# Altium PCB MiniMax 4bit.pcbdoc (part 3 of 3)
Units mil, origin at the board's own origin, x right, y up, seen from the top; angles counter-clockwise.
Board outline 6151.56 x 5816.92 mil, 2 copper layers (Top Layer, Bottom Layer); 181 components, 187 nets, 727 pads, 463 vias.
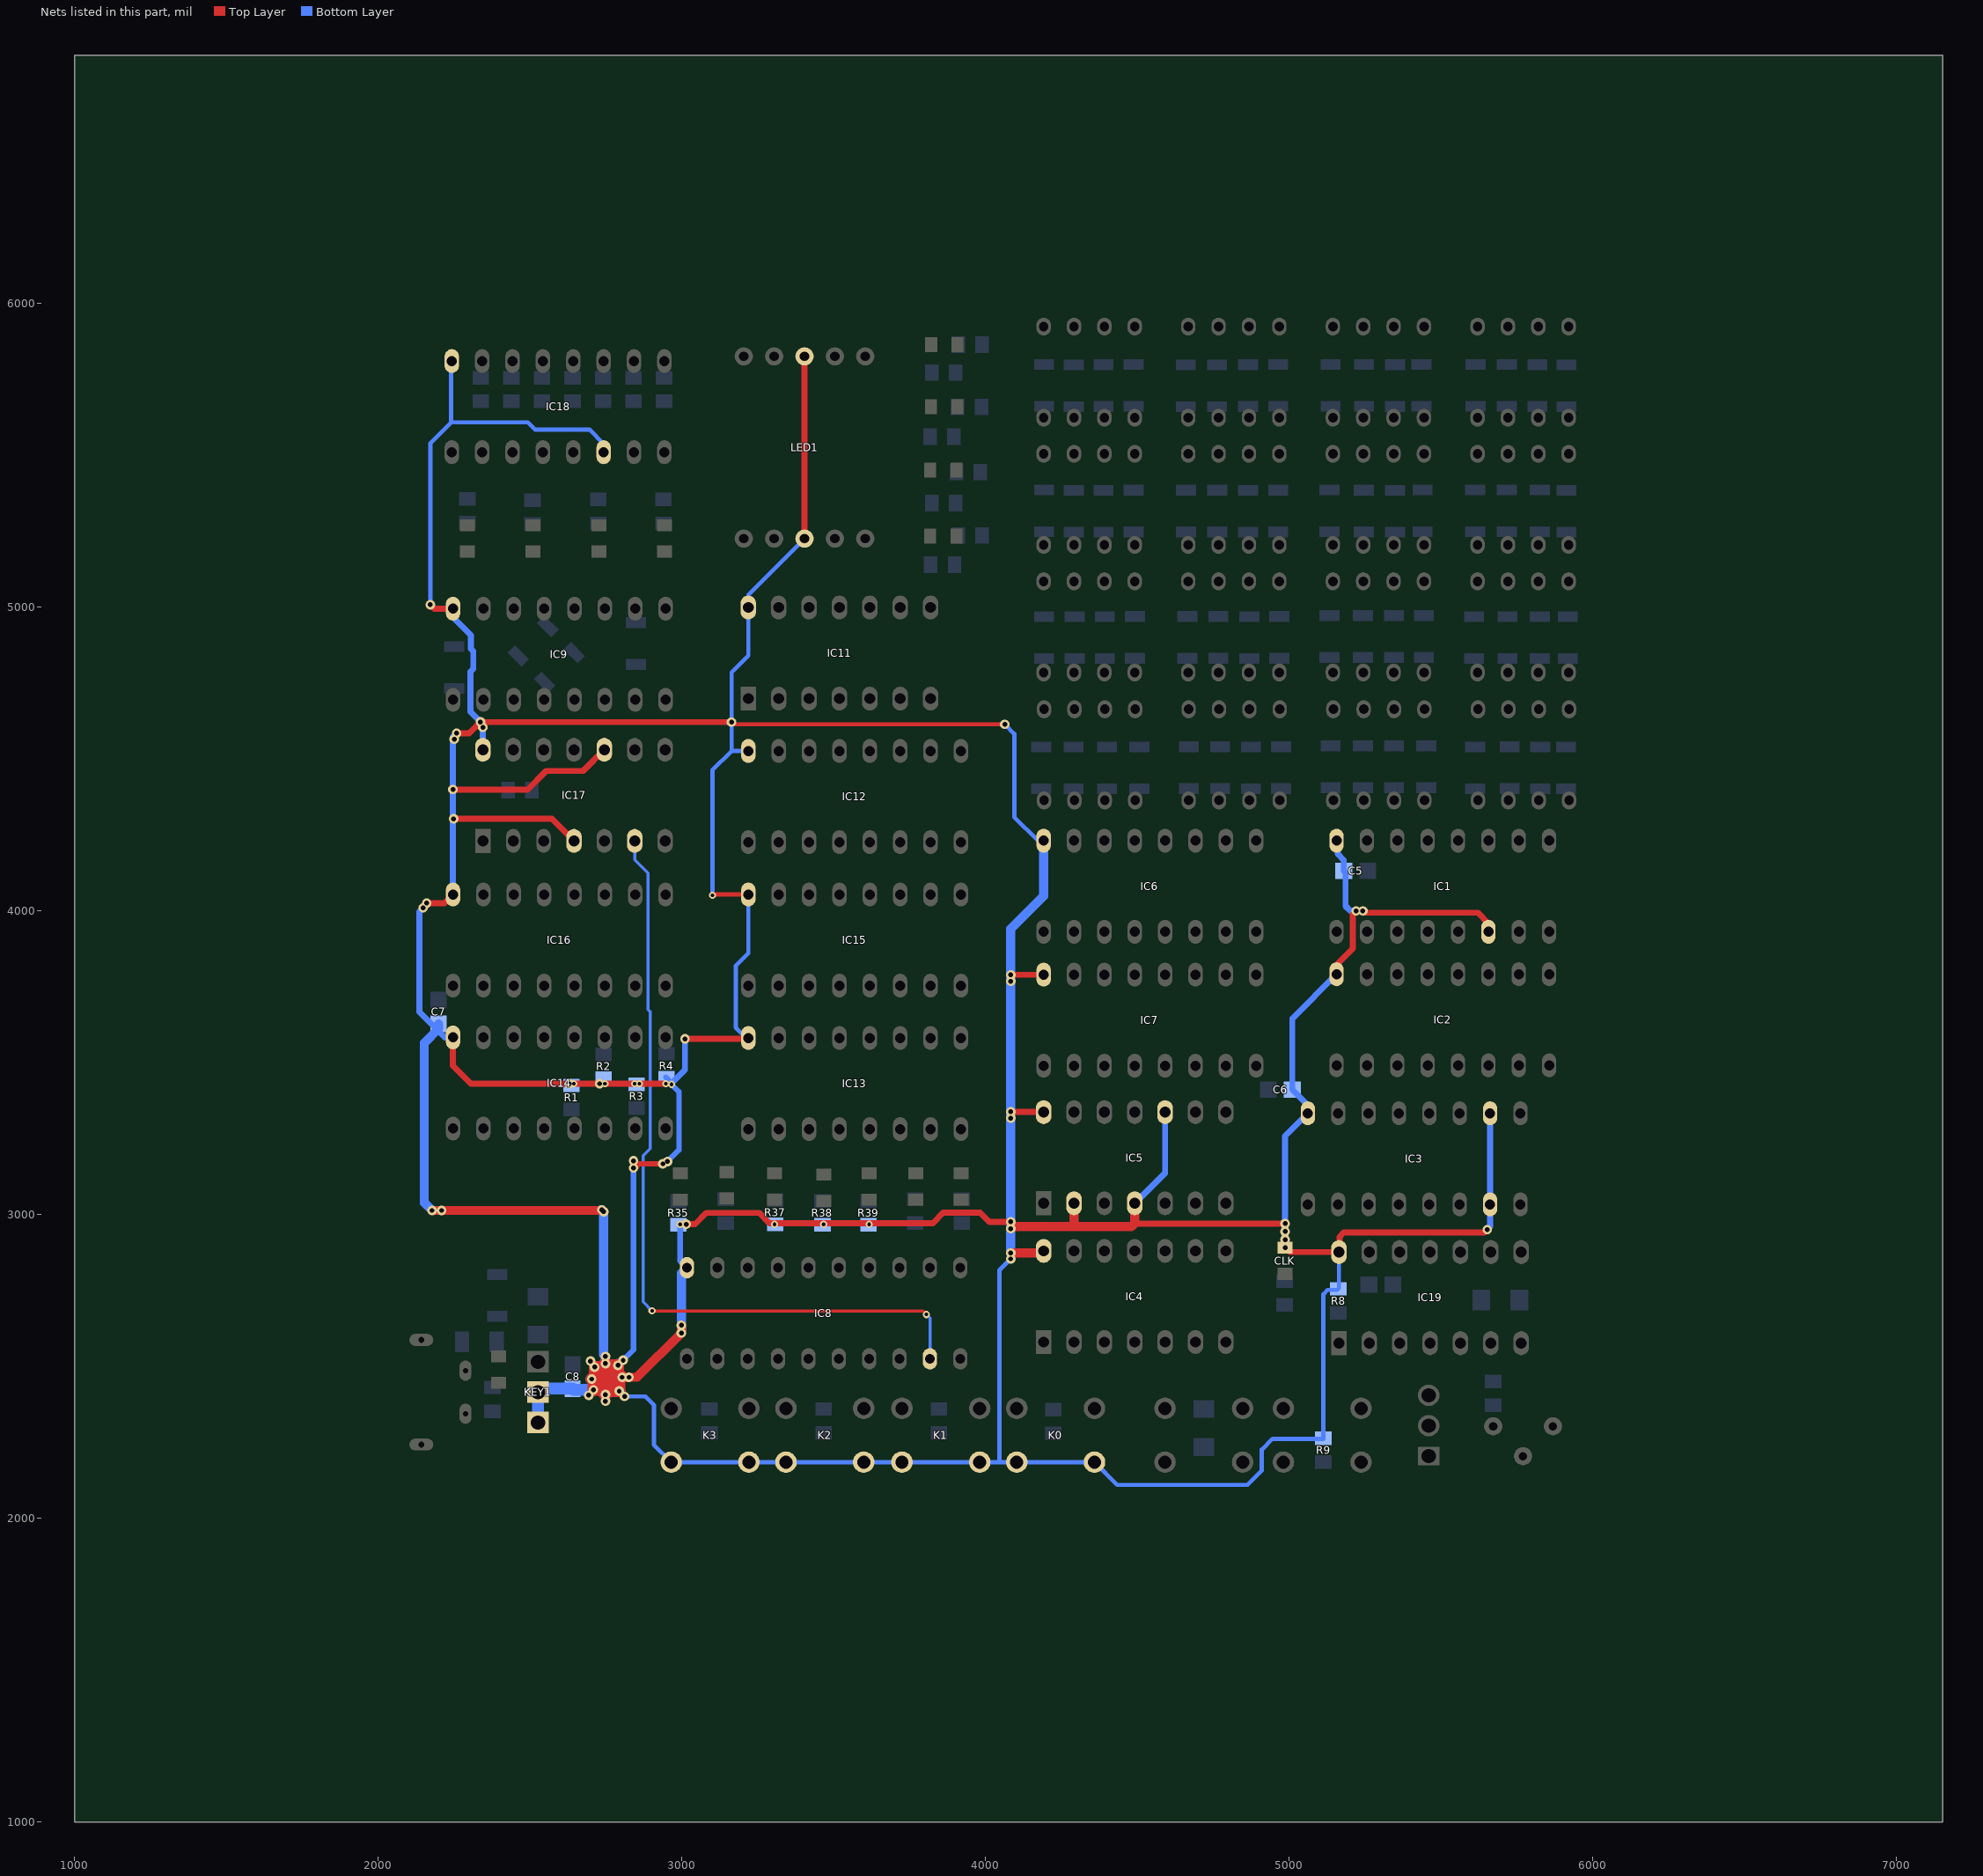
[diagram p3: the nets of this part, all layers, seen from the top]

## Via types
v1: diameter 24, hole 12, Top Layer to Bottom Layer, tented both sides, 306 vias
v2: diameter 27.56, hole 15.75, Top Layer to Bottom Layer, tented both sides, 98 vias
v3: diameter 31.5, hole 15.75, Top Layer to Bottom Layer, tented both sides, 59 vias

## Nets (pads, with @x,y where several pads share a name; then routed paths per layer and width w, separated by ;. In a path a pad name is that pad's centre, name@x,y a point inside that pad or via, vN(x,y) a via of type N, cw(c..) or ccw(c..) an arc to the next point about the centre after c; other vN are vias at no path point) (continued)
VCC: C5.1 C6.1 C7.1 C8.1 CLK.2 IC1.6 IC1.16 IC2.16 IC3.7 IC3.10 IC3.16 IC4.14 IC5.2 IC5.4 IC5.10 IC5.14 IC6.16 IC7.16 IC8.20 IC9.16 IC11.14 IC12.16 IC13.16 IC14.16 IC15.16 IC16.16 IC17.4 IC17.10 IC17.14 IC18.6 IC18.16 IC19.14 K0.1 K0.2 K1.1 K1.2 K2.1 K2.2 K3.1 K3.2 KEY1.2 KEY1.3 LED1.3 LED1.8 R1.2 R2.2 R3.2 R4.2 R8.2 R9.2 R35.1 R37.1 R38.1 R39.1 | length 26939.2
  Top Layer w14.02: v1(3100.39,4051.17) 3103.17,4053.91 IC15.16@3218.5,4053.93 ; v3(3163.37,4621.47) 3170.67,4614.21 v3(4062.97,4614.21)
  Top Layer w17.99: v3(2952.24,3174.68) 2944.88,3167.32 v3(2937.01,3167.32) 2850.39,3167.32 v3@2840.55,3177.16 ; v3(2840.55,3153.54) v3(2840.55,3177.16) ; v3@2840.55,3153.54 2846.45,3153.54 2850.38,3157.21 v3@2840.55,3177.16 ; v3@2840.55,3153.54 v3@2840.55,3177.16
  Top Layer w19.68: v1(2643.7,3431.1) v3(2728.93,3431.1) v1(2746.06,3431.1) v1(2844.49,3431.1) v1(2860.22,3431.11) v1(2946.85,3431.1) ; v1@2994.07,2967.81 2994.76,2968.5 v3(3013.78,2968.5) 3043.26,2968.5 3080.67,3005.91 3253.97,3005.91 3288.07,2971.81 3769.67,2971.81 ; v3@3009.87,3578.71 3215.77,3578.71 IC13.16@3218.5,3581.49 ; LED1.3@3403.54,5225.58 LED1.8@3403.54,5825.58
  Top Layer w20: v3@2159.47,4025.61 2217.77,4025.61 IC16.16@2246.06,4053.93 ; v3(2171.26,5007.86) 2184.27,4994.91 IC9.16@2246.06,4994.88 ; IC14.16@2246.06,3583.46 2246.07,3490.11 2305.07,3431.11 v3(2628.4,3431.1) ; v3(2246.06,4399.6) 2492.17,4399.61 2553.17,4460.61 2674.87,4460.61 IC17.10@2744.49,4530.31 ; v3@2248.07,4303.11 2571.67,4303.11 IC17.4@2644.49,4230.31 ; v3(2257.87,4584.64) 2299.21,4584.64 v3(2336.61,4622.04) ; v3@2342.52,4618.1 2340.55,4618.1 v3(2336.61,4622.04) ; v3(2628.4,3431.1) v1(2643.7,3431.1) ; v3(2692.87,2405.51) 2692.87,2407.44 v3(2806.29,2520.86) ; v3(2698.82,2517.71) 2698.82,2513.77 v3(2811.02,2401.57) ; v3(2702.75,2458.66) 2819.72,2458.66 v3(2825.62,2464.56) ; v3(2748.03,2385.82) v3(2748.03,2533.46) ; v3(3163.37,4621.47) 2337.18,4621.48 v3(2336.61,4622.04) ; 3769.67,2971.81 3826.17,2971.81 3860.27,3005.91 3982.27,3005.91 4011.67,2976.51 v3(4082.67,2976.48) ; v3(4082.67,3338.58) 4189.77,3338.61 IC5.14@4190.97,3337.41 ; v3(4082.67,3789.41) IC7.16@4190.97,3790.11 ; IC5.4@4490.97,3037.41 4490.97,2981.51 4501.97,2970.51 v3(4986.21,2970.47) ; v3(4986.21,2891.73) 5001.17,2876.81 IC19.14@5163.38,2876.77 5165.37,2878.71 5165.37,2927.21 5179.17,2940.91 5641.77,2940.91 v3(5651.57,2950.81) v3@5655.47,2950.81 ; IC2.16@5155.51,3791.28 5155.47,3822.81 5208.67,3876.01 5208.67,3988.91 v3(5219.75,3999.99) v3(5242.12,3999.99) ; v3(5242.12,3999.99) 5248.07,3994.11 5620.07,3994.11 5655.47,3958.61 IC1.6@5655.5,3931.1
  Top Layer w30: v3(2177.16,3013.77) v3(2208.72,3013.77) 2738.19,3013.78 v3(2742.12,3009.84) ; v3@2803.15,2464.57 v3(2825.62,2464.56) 2852.36,2464.57 v3(2998.03,2610.23) v3(2998.03,2635.72) ; v3(4082.67,2874.01) 4184.27,2874.01 IC4.14@4190.97,2880.71 ; v3(4082.67,2953.88) 4089.47,2960.61 4480.27,2960.61 4490.97,2971.21 IC5.4@4490.97,3037.41 ; 4290.57,2960.61 IC5.2@4290.97,3037.41
  Top Layer w39.37: v3(2702.75,2458.66) 2708.66,2452.75 v3(2708.66,2423.22) 2732.29,2423.22 v3(2748.03,2407.48) 2759.84,2419.29 v3(2793.3,2419.29) 2793.3,2454.71 v3(2803.15,2464.56) 2789.37,2478.34 v3(2789.37,2503.93) 2753.94,2503.93 v3(2748.03,2509.84) 2736.2,2498.01 v3(2712.55,2498.01) 2712.55,2468.46 v3(2702.75,2458.66)
  Bottom Layer w14.02: v3(2171.26,5007.86) 2171.26,5539.3 2240.17,5608.21 ; IC18.16@2242.17,5809.81 2240.17,5807.81 2240.17,5637.81 2240.17,5608.21 ; IC18.6@2742.17,5509.81 2742.17,5537.41 2694.87,5584.61 2515.77,5584.61 2492.17,5608.21 2240.17,5608.21 ; v3@2787.4,2423.23 2791.34,2419.29 v3(2793.3,2419.29) ; v3(2793.3,2419.29) 2811.07,2401.61 2879.87,2401.61 2907.47,2374.01 2907.47,2242.01 K3.1@2964.52,2185.02 ; K3.1@2964.52,2185.02 K0.2@4358.31,2185.02 4433.1,2110.24 4862.2,2110.24 ; v1(3100.39,4051.17) 3100.39,4463.43 3163.37,4526.41 ; IC13.16@3218.5,3581.49 3211.77,3581.51 3177.17,3616.11 3177.17,3818.91 3218.47,3860.21 IC15.16@3218.5,4053.93 ; IC12.16@3218.5,4526.37 3163.37,4526.41 ; LED1.3@3403.57,5225.61 3218.47,5040.51 IC11.14@3218.5,4998.81 3218.47,4840.51 3163.37,4785.41 v3(3163.37,4621.47) 3163.37,4526.41 ; 4045.36,2185.02 4045.36,2817.01 v3(4082.67,2854.33) ; v3(4062.97,4614.21) 4094.47,4582.71 4094.47,4309.01 4172.47,4231.11 IC6.16@4190.97,4231.11 ; 4862.17,2110.21 4909.47,2157.51 4909.47,2226.41 4944.87,2261.81 5112.17,2261.81 5112.17,2738.21 5125.97,2752.01 5157.47,2752.01 5163.37,2757.91 IC19.14@5163.38,2876.77
  Bottom Layer w17.99: v3(2789.37,2503.93) v3(2806.29,2520.86) 2840.55,2555.12 v3(2840.55,3177.16) v3(2840.55,3153.54) ; v3(2937.01,3167.32) 2944.88,3167.32 v3(2952.24,3174.68) 2990.17,3212.61 2990.17,3404.21 2965.67,3428.81 2965.67,3433.31 R4.2@2946.87,3452.11
  Bottom Layer w19.68: R4.2@2965.67,3428.81 2965.67,3432.21 3009.87,3476.41 v3@3009.87,3578.71 ; R35.1@2994.07,2967.81 2994.07,2847.61 IC8.20@3016.57,2825.21
  Bottom Layer w20: v3@2147.67,4009.81 2135.87,3998.01 2135.87,3667.31 2219.67,3583.51 IC14.16@2246.06,3583.46 ; v3(2147.64,4009.84) 2147.64,4013.78 v3(2159.45,4025.58) ; IC16.16@2246.06,4053.93 2246.07,4572.81 v3(2257.87,4584.64) ; IC9.16@2246.06,4994.88 2246.07,4966.51 2305.07,4907.51 2305.07,4862.21 2312.97,4854.31 2312.97,4797.21 2303.17,4787.41 2303.17,4655.51 v3(2336.61,4622.04) ; v3(2336.61,4622.04) 2344.5,4614.15 v3(2344.5,4603.95) ; IC17.14@2344.49,4530.31 v3@2344.47,4603.91 ; IC5.4@4490.97,3037.41 4590.97,3137.41 IC5.10@4590.97,3337.41 ; v3(4986.21,2944.32) 4986.17,3258.61 IC3.16@5061.02,3333.46 5060.97,3360.21 5009.87,3411.41 5009.87,3645.61 IC2.16@5155.51,3791.28 ; v3(4986.21,2891.73) v3(4986.21,2917.52) v3(4986.21,2944.32) ; IC1.16@5155.51,4231.1 5159.47,4227.11 5159.47,4187.01 5179.17,4167.31 5179.17,4131.91 5185.07,4126.01 5185.07,4015.71 5200.77,4000.01 v3(5219.75,3999.99) v3(5242.12,3999.99) ; v3(5651.57,2950.81) 5660.97,2960.21 IC3.7@5661.02,3033.46 IC3.10@5661.02,3333.46
  Bottom Layer w30: C7.1@2198.87,3627.91 2198.87,3612.21 2151.57,3564.91 2151.57,3039.41 v3(2177.16,3013.77) v3(2208.72,3013.77) ; v3@2732.28,3015.74 v3(2736.22,3015.74) v3(2742.12,3009.84) 2742.12,2539.37 v3(2748.03,2533.46) v3(2748.03,2509.84) ; v3(2998.03,2610.23) v3(2998.03,2635.72) 2998.07,2806.71 IC8.20@3016.57,2825.21 ; v3(4082.67,2874.01) v3(4082.67,2953.88) v3(4082.67,2976.48) v3(4082.67,3317.49) v3(4082.67,3768.29) 4082.67,3940.91 4190.97,4049.21 IC6.16@4190.97,4231.11
  Bottom Layer w39.37: KEY1.3@2525.57,2315.31 2525.57,2415.31 2537.37,2427.11 2639.77,2427.11 2643.67,2423.21 v3(2708.66,2423.22) ; v3(2702.75,2458.66) 2744.09,2458.66 2748.03,2462.6 ; v3(2708.66,2423.22) 2748.03,2462.6 ; v3(2712.55,2498.01) 2748.07,2462.61 ; v3(2748.03,2407.48) 2748.03,2462.6 ; v3(2748.03,2509.84) 2748.03,2462.6 ; v3@2789.37,2505.9 v3(2789.37,2503.93) 2748.03,2462.6 ; v3@2791.34,2462.6 2748.03,2462.6 ; v3(2793.3,2419.29) 2791.33,2419.29 2748.03,2462.6
  other v1: 2994.09,2967.86 3305.11,2967.86 3466.53,2967.86 3616.14,2967.86 2965.65,3428.76
  other v3: 3009.84,3578.73 2248.03,4303.14 2250,4564.95
ZF: IC8.9 IC17.6 | length 2649.6
  Top Layer w10: v1(2901.57,2683.07) 3793.21,2683.07 v1@3805.07,2671.21
  Bottom Layer w10: IC17.6@2844.49,4230.31 2844.47,4167.31 2887.77,4124.01 2887.77,3675.21 2895.67,3667.31 2895.67,3217.31 2872.07,3193.71 2872.07,2712.61 v1(2901.57,2683.07) ; v1@3805.07,2671.21 3816.57,2659.81 IC8.9@3816.57,2525.21
  other v1: 3805.11,2671.26
pads on no net: IC3.15 IC5.6 IC5.9 IC6.15 IC8.11 IC8.14 IC12.15 IC13.15 IC17.5 IC17.8 LED1.5 USB.3 USB.4

## Polygon pours and split planes (outlines as drawn)
GND on Bottom Layer (solid): 2041.34,6311.01 1850.39,6311.01 1500,5960.62 1500,2041.34 2041.34,1500 5931.09,1500 6651.56,2220.47 6366.13,4263.77 4072.83,4279.52 4066.92,6316.92
GND on Top Layer (solid): 2175.2,6127.94 2139.77,6127.94 1940.95,5929.12 1940.95,2059.05 2232.29,1767.71 5811.02,1767.71 6165.35,2122.04 6165.35,4228.33 6129.92,4263.77 4070.86,4263.77 4070.86,6027.54 3988.19,6110.22

## Other copper
Top Layer:
  region net R5_2: 5877.06,2331.77 5838.57,2308.45 5838.26,2332.82 5855.6,2343.32
  region net IN0: 4115.64,2395.05 4068.07,2371.34 4076.07,2403.04 4085.5,2407.75
  region net VCC: 3426.04,5245.42 3381.04,5245.42 3393.7,5266.42 3413.38,5266.42
  region net VCC: 3426.04,5805.74 3381.04,5805.74 3393.7,5784.74 3413.38,5784.74
  region net SEGA: 2949.04,5687.33 2949,5669.33 2957.41,5673.31 2957.43,5683.31
  region net SEGB: 2848.51,5687.33 2848.46,5669.33 2856.87,5673.31 2856.9,5683.31
  region net SEGF: 2345.89,5687.33 2345.84,5669.33 2354.25,5673.31 2354.28,5683.31
  region net SEGG: 2446.42,5687.33 2446.37,5669.33 2453.96,5673.31 2453.98,5683.31
  region net SEGB: 2887.9,5956 2903.7,5947.37 2896.77,5941.58 2886.77,5947.05
  region net SEGA: 3002.71,5919.11 2989.99,5931.85 2986.87,5923.09 2993.94,5916.01
  region net SEGG: 2486.32,5869.41 2502.1,5860.75 2495.17,5854.98 2485.17,5860.46
  region net SEGF: 2404.32,5891.56 2391.56,5904.26 2388.47,5895.48 2395.56,5888.43
  region net ROM3: 4193.14,5811.16 4180.41,5798.43 4177.3,5807.2 4184.37,5814.27
  region net ROM0: 5903.47,5693.75 5903.47,5711.75 5895.07,5707.75 5895.07,5697.75
  region net ROM0: 5903.47,5280.36 5903.47,5298.36 5895.07,5294.36 5895.07,5284.36
  region net ROM3: 4200.33,5376.79 4200.33,5394.79 4208.73,5390.79 4208.73,5380.79
  region net ROM0: 5903.47,4863.04 5903.47,4881.04 5895.07,4877.04 5895.07,4867.04
  region net ROM3: 4200.33,4959.47 4200.33,4977.47 4208.73,4973.47 4208.73,4963.47
  region net ROM0: 5908.86,4434.89 5908.86,4452.89 5900.46,4448.89 5900.46,4438.89
  region net ROM3: 4205.72,4531.32 4205.72,4549.32 4214.12,4545.32 4214.12,4535.32
  region net ROM3: 4002.03,5855.16 4002.03,5873.16 4010.43,5869.17 4010.43,5859.17
  region net ROM0: 4000.08,5227.45 3995.64,5244.89 4004.57,5243.88 4007.44,5232.61
  region net ROM2: 4013.84,5756.74 4013.84,5774.74 4022.24,5770.74 4022.24,5760.74
  region net KEYS2_8: 5298.01,5844.65 5285.26,5831.94 5281.45,5840 5289.95,5848.48
  region net KEYS7_8: 5660.2,5435.2 5647.46,5422.48 5643.65,5430.54 5652.15,5439.02
  region net KEYS6_8: 5749.93,5552.01 5749.93,5570.01 5741.53,5567.02 5741.53,5555.01
  region net IC19_1: 4935.11,2567.81 4935.11,2585.81 4943.51,2581.81 4943.51,2571.81
  region net ROM4: 4342.68,4056.33 4329.95,4069.06 4338.72,4072.17 4345.79,4065.1
  region net KEYS15_8: 5690.75,4025.04 5684.2,4008.27 5677.7,4014.71 5681.6,4024.71
  region net KEYS14_8: 5805.86,4057.25 5793.13,4044.52 5790.02,4053.29 5797.09,4060.36
  region net KEYS9_8: 5974.33,3670.13 5974.33,3688.13 5965.93,3684.13 5965.93,3674.13
  region net KEYS9_8: 5994.81,5022.43 5982.1,5009.68 5978.98,5018.45 5986.04,5025.53
  region net KEYS13_8: 5962.44,3820.33 5978.24,3811.7 5979.37,3820.65 5969.37,3826.12
  region net KEYS9_8: 5566.95,3668.37 5562.61,3685.84 5571.69,3684.13 5574.18,3674.13
  region net PCLD: 3020.79,3139.84 3002.79,3139.8 3006.77,3148.21 3016.77,3148.23
  region net IC9_2: 2352.43,4794.42 2352.42,4776.42 2360.82,4780.41 2360.83,4790.41
  region net IC17_2: 2641.15,4846.7 2638.44,4828.91 2630.73,4834.07 2632.25,4844.07
  region net IC17_2: 2657.51,4843.43 2653.17,4825.96 2662.25,4827.67 2664.74,4837.67
  region net IC17_2: 2469.06,4830.07 2469.06,4848.07 2477.46,4844.07 2477.46,4834.07
  region net IC17_2: 2453.18,4830.07 2453.18,4848.07 2444.78,4844.07 2444.78,4834.07
  region net IC17_2: 2286.28,4848.79 2284.65,4830.86 2293.38,4834.07 2294.29,4844.07
  region net IC13_13: 2358.29,3479.39 2353.95,3496.86 2363.03,3495.15 2365.52,3485.15
  region net IC13_14: 2261.29,3387.67 2252.62,3403.44 2261.57,3404.6 2267.07,3394.6
  region net IC13_11: 3714.5,3508.71 3714.5,3526.71 3706.1,3522.71 3706.1,3512.71
  region net H1_2: 5514.55,2671.1 5501.79,2683.79 5498.7,2675.02 5505.79,2667.96
  region net H1_2: 4218.56,2678.01 4218.55,2696.01 4226.95,2692.01 4226.96,2682.01
  region net IC9_6: 3712.94,4751.16 3708.59,4768.63 3701.37,4762.87 3703.86,4752.87
  region net IC9_12: 3805.05,4855.16 3805.05,4873.16 3796.65,4869.16 3796.65,4859.16
  region net ADSLD: 3671.32,3469.34 3671.32,3487.34 3679.72,3483.34 3679.72,3473.34
  region net ADSLD: 3920.04,3476.54 3907.31,3463.81 3904.2,3472.58 3911.27,3479.65
  region net ACCLD: 3916.68,4387.89 3908,4403.66 3902.23,4396.72 3907.73,4386.72
  region net FLGCK: 2651.64,4382.72 2651.64,4400.72 2660.04,4396.72 2660.04,4386.72
  region net IC12_4: 3905.87,4127.14 3901.54,4144.61 3894.31,4138.85 3896.8,4128.85
  region net IC12_3: 3801.12,3855.17 3801.11,3873.17 3792.71,3869.17 3792.71,3859.17
  region net ALU1: 2304.54,3903.39 2295.95,3919.21 2304.91,3920.31 2310.34,3910.31
  region net PCLD: 5758.91,3178.99 5745.88,3191.4 5741.35,3184.11 5751.85,3174.11
  region net REGWR: 3399.54,2906.35 3399.54,2924.35 3391.14,2920.35 3391.14,2910.35
  region net VCC: 3002.37,2959.18 3001.67,2977.17 3010.03,2978.34 3010.8,2958.66
  region net VCC: 3314.99,2961.05 3310.64,2978.51 3318.51,2981.65 3323.41,2961.97
  region net VCC: 3299.58,2978.51 3295.23,2961.05 3286.8,2961.97 3291.71,2981.65
  region net VCC: 3476.41,2961.05 3472.06,2978.51 3479.93,2981.65 3484.84,2961.97
  region net VCC: 3461.01,2978.51 3456.65,2961.05 3448.23,2961.97 3453.13,2981.65
  region net VCC: 3626.02,2961.05 3621.67,2978.51 3629.54,2981.65 3634.45,2961.97
  region net VCC: 3610.61,2978.51 3606.26,2961.05 3597.84,2961.97 3602.74,2981.65
  region net CC: 2819.06,3085.86 2806.33,3098.59 2813.39,3099.99 2820.46,3092.92
  region net CC: 3860.17,3087.45 3860.17,3105.45 3851.77,3101.45 3851.77,3091.45
  region net ZF: 2909.51,2674.07 2909.51,2692.07 2917.91,2688.07 2917.91,2678.07
  region net ZF: 3805.81,2683.24 3793.14,2670.46 3789.99,2679.22 3797.03,2686.32
  region net A1: 2412.55,5352.4 2394.55,5352.44 2398.57,5360.83 2408.57,5360.81
  region net A1: 2528.82,5422.09 2528.81,5440.09 2537.22,5436.09 2537.22,5426.09
  region net A1: 2631.82,5422.09 2631.82,5440.09 2623.42,5436.09 2623.42,5426.09
  region net KEYS10_8: 5389.73,5093.89 5389.69,5075.89 5381.29,5075.07 5381.34,5094.76
  region net KEYS10_8: 5405.61,5075.89 5405.56,5093.89 5413.96,5094.76 5414.01,5075.07
  region net CMD3: 4835,2467.7 4830.67,2485.17 4823.44,2479.41 4825.92,2469.41
  region net A0: 3411.35,4418.16 3411.35,4436.16 3402.95,4432.16 3402.95,4422.16
  region net A1: 2709.42,4352.24 2696.69,4364.96 2693.58,4356.2 2700.65,4349.12
  region net A1: 2378.02,4341.39 2378.02,4359.39 2386.42,4355.39 2386.42,4345.39
  region net A2: 2694.97,4105.19 2694.93,4123.19 2703.33,4119.21 2703.36,4109.21
  region net A2: 2679.07,4105.17 2679.07,4123.17 2670.67,4119.17 2670.67,4109.17
  region net A2: 2387.95,4922.46 2375.22,4935.19 2383.99,4938.3 2391.06,4931.23
  region net A3: 3673.02,5062.43 3666.51,5045.65 3659.99,5052.08 3663.87,5062.08
  region net A3: 2752.03,5048.08 2752.03,5066.08 2760.43,5062.08 2760.43,5052.08
  region net CMD2: 2357.14,3844.11 2350.59,3827.34 2359.74,3827.67 2363.64,3837.67
  region net CMD1: 4019.61,3939.81 4019.61,3957.81 4011.21,3953.81 4011.21,3943.81
  region net ROM3: 5512.57,3693.09 5499.79,3680.4 5496.71,3689.18 5503.81,3696.23
  region net ROM3: 4798.34,3684.95 4796.13,3702.82 4804.96,3699.91 4806.19,3689.91
  region net ROM3: 4782.58,3702.82 4780.38,3684.95 4772.53,3689.91 4773.76,3699.91
  region net ROM2: 4464.73,3641.63 4452,3628.91 4460.18,3626.38 4467.25,3633.45
  region net ROM2: 5316.87,3620.91 5316.86,3638.91 5308.47,3634.92 5308.46,3624.92
  region net ROM2: 4683.68,3620.91 4683.68,3638.91 4675.28,3634.92 4675.28,3624.92
  region net ROM2: 4699.56,3620.92 4699.55,3638.92 4707.95,3634.92 4707.96,3624.92
  region net REG2: 3102.43,4815.8 3102.42,4833.8 3110.83,4829.8 3110.83,4819.8
  region net REG2: 3299.57,4831.51 3295.24,4814.04 3288.01,4819.8 3290.49,4829.8
  region net REG2: 2554.63,3680.83 2553.34,3662.88 2562.01,3666.25 2562.72,3676.25
  region net MCLK: 5725.73,3269.58 5717.05,3253.81 5711.28,3260.75 5716.78,3270.75
  region net MCLK: 4499.12,3255.81 4496.98,3273.69 4505.79,3270.75 4506.99,3260.75
  region net MCLK: 4483.35,3273.69 4481.22,3255.81 4473.35,3260.75 4474.54,3270.75
  region net MCLK: 5169.33,3256.73 5169.29,3274.73 5177.7,3270.75 5177.72,3260.75
  region net MCLK: 5153.45,3274.73 5153.41,3256.73 5145.02,3260.75 5145.04,3270.75
  region net RST: 2348.51,4144.51 2348.51,4162.51 2356.91,4158.51 2356.91,4148.51
  region net VCC: 3109.72,4043.63 3106.7,4061.38 3115.3,4060.92 3117.69,4046.9
  region net VCC: 4096.27,2945.94 4088.85,2968.37 4098.07,2975.61 4107.98,2945.61
  region net VCC: 4093.08,2862.2 4093.08,2885.82 4104.11,2889.01 4104.11,2859.01
  region net VCC: 4093.16,3777.67 4093.01,3801.29 4104.04,3799.55 4104.17,3779.55
  region net VCC: 3177.17,4629.06 3169.17,4606.83 3181.02,4607.2 3186.07,4621.22
  region net VCC: 3152.96,4609.66 3152.95,4633.28 3141.93,4631.48 3141.93,4611.48
  region net VCC: 2337.6,4606.32 2320.89,4623.03 2314.38,4613.95 2328.52,4599.81
  region net VCC: 2347.33,4633.57 2346.71,4609.96 2357.78,4611.48 2358.31,4631.48
  region net VCC: 2186.97,5008.89 2170.31,4992.14 2177.22,4987.82 2191.32,5002
  region net VCC: 2268.29,4572.83 2268.29,4596.45 2279.31,4594.64 2279.31,4574.64
  region net VCC: 2256.48,4387.8 2256.47,4411.42 2267.49,4409.61 2267.5,4389.61
  region net VCC: 2258.46,4314.94 2258.43,4291.32 2269.45,4293.11 2269.48,4313.11
  region net VCC: 2169.88,4013.78 2169.85,4037.41 2180.88,4035.61 2180.9,4015.61
  region net VCC: 4093.1,3326.79 4093.07,3350.41 4104.09,3348.61 4104.12,3328.61
  region net VCC: 4072.27,2988.31 4072.24,2964.69 4061.21,2966.51 4061.24,2986.51
  region net VCC: 2351.16,4618.22 2329.51,4608.78 2326.76,4617.75 2346.46,4626.34
  region net VCC: 5204.25,3997.18 5224.48,3984.97 5218.67,3975.6 5198.67,3987.67
  region net VCC: 5001.92,2892.74 4985.24,2876.01 4994.11,2869.73 5008.23,2883.89
  region net VCC: 5647.78,2935.52 5636.88,2956.48 5627.35,2950.91 5637.76,2930.91
  region net VCC: 4975.81,2982.3 4975.77,2958.68 4964.75,2960.51 4964.79,2980.51
  region net VCC: 3003.37,2956.69 3003.37,2980.31 2994.76,2978.34 2994.76,2958.66
  region net VCC: 3024.2,2956.69 3024.2,2980.31 3035.22,2978.34 3035.22,2958.66
  region net VCC: 3020.27,3590.53 3020.25,3566.91 3031.27,3568.87 3031.29,3588.55
  region net VCC: 4052.55,4602.4 4052.55,4626.02 4041.53,4621.22 4041.53,4607.2
  region net VCC: 2999.01,2594.52 2982.31,2611.22 2972.26,2605.68 2993.47,2584.47
  region net VCC: 3009.84,2620.65 2986.22,2620.65 2983.03,2631.67 3013.03,2631.67
  region net VCC: 3009.84,2625.3 2986.22,2625.3 2983.03,2614.28 3013.03,2614.28
  region net VCC: 2813.57,2452.75 2813.56,2476.37 2824.59,2479.57 2824.59,2449.57
  region net VCC: 2836.04,2452.75 2836.03,2476.37 2847.06,2479.57 2847.06,2449.57
  region net VCC: 2815.21,2476.37 2815.2,2452.75 2804.18,2449.57 2804.18,2479.57
  region net VCC: 2734.05,3023.36 2729.71,3000.14 2718.24,2998.78 2723.84,3028.78
  region net VCC: 2726.93,3003.03 2724.77,3026.55 2713.49,3028.78 2716.25,2998.78
  region net VCC: 2187.58,3001.96 2187.57,3025.59 2198.6,3028.78 2198.6,2998.78
  region net VCC: 2219.14,3001.96 2219.13,3025.59 2230.16,3028.78 2230.16,2998.78
  region net VCC: 2198.31,3025.59 2198.3,3001.96 2187.28,2998.78 2187.28,3028.78
  region net VCC: 2926.59,3155.51 2926.59,3179.13 2915.57,3176.32 2915.57,3158.33
  region net VCC: 2948,3159.52 2937.72,3180.78 2932.66,3176.32 2941.36,3158.33
  region net VCC: 2852.36,3163.96 2828.74,3163.96 2831.55,3174.98 2849.55,3174.98
  region net VCC: 2852.87,3163.35 2829.28,3164.55 2831.35,3175.48 2851.92,3174.43
  region net VCC: 2852.36,3163.96 2828.74,3163.96 2831.55,3174.98 2849.55,3174.98
  region net VCC: 2852.36,3166.74 2828.74,3166.74 2831.55,3155.72 2849.55,3155.72
  region net VCC: 2834.56,3162.6 2855.75,3173.04 2858.1,3161.91 2841.96,3153.95
  region net VCC: 2855.22,3182.88 2844.38,3161.89 2854.95,3158.33 2864.24,3176.32
  region net VCC: 2852.36,3166.74 2828.74,3166.74 2831.55,3155.72 2849.55,3155.72
  region net IC19_1: 5137.79,2564.31 5137.79,2589.31 5122.79,2581.81 5122.79,2571.81
  region net PCLD: 2999.27,3155.51 3018.7,3155.51 3016.77,3157.51 3006.77,3157.51
  region net IC1_4: 5479.13,3946.84 5479.13,3915.34 5508.66,3921.27 5508.66,3940.95
  region net IC1_4: 5531.89,3915.34 5531.89,3946.84 5502.36,3940.95 5502.36,3921.27
  region net VCC: 5676.19,3958.25 5634.83,3935.43 5631.91,3968.08 5650.13,3978.13
  region net VCC: 5177.24,3797.76 5133.78,3816.28 5157.36,3838.84 5177.19,3830.39
  region net VCC: 4167.32,3774.4 4167.32,3805.9 4137.32,3799.77 4137.32,3779.77
  region net CMD1: 4567.32,3801.29 4576.46,3824.56 4552.32,3835.89 4552.32,3821.74
  region net ROM7: 4667.32,3801.26 4676.43,3824.54 4652.32,3835.83 4652.32,3821.69
  region net VCC: 2222.44,4979.12 2222.44,5010.62 2192.44,5004.91 2192.44,4984.91
  region net A2: 2432.93,4959.49 2422.44,4982.18 2407.44,4961.75 2407.44,4947.61
  region net VCC: 3194.87,3565.75 3194.87,3597.24 3165.34,3588.55 3165.34,3568.87
  region net VCC: 2269.68,3567.72 2222.44,3567.71 2236.07,3537.71 2256.07,3537.72
  region net REG0: 2669.68,3272.36 2660.58,3249.08 2684.68,3237.76 2684.68,3251.91
  region net VCC: 3194.87,4038.17 3194.87,4069.67 3173.84,4060.92 3173.84,4046.9
  region net REG1: 3630.98,4018.12 3605.98,4018.14 3613.47,4004.32 3623.47,4004.31
  region net VCC: 2252.75,4015.52 2222.45,4055.29 2217.77,4039.75 2224.84,4018.54
  region net A1: 2427.69,5475.4 2418.52,5498.66 2403.57,5478.28 2407.1,5467.68
  region net IC4_3: 4416.53,2594.49 4416.53,2566.93 4446.06,2570.87 4446.06,2590.55
  region net IC4_3: 4465.35,2566.93 4465.35,2594.49 4435.82,2590.55 4435.82,2570.87
  region net IC4_3: 4516.53,2594.49 4516.53,2566.93 4546.06,2570.87 4546.06,2590.55
  region net IC4_3: 4565.35,2566.93 4565.35,2594.49 4535.82,2590.55 4535.82,2570.87
  region net IC4_9: 4665.35,2866.93 4665.35,2894.49 4635.82,2890.55 4635.82,2870.87
  region net IC4_9: 4565.35,2866.93 4565.35,2894.49 4535.82,2890.55 4535.82,2870.87
  region net IC4_9: 4616.53,2894.49 4616.53,2866.93 4646.06,2870.87 4646.06,2890.55
  region net IC4_9: 4516.53,2894.49 4516.53,2866.93 4546.06,2870.87 4546.06,2890.55
  region net VCC: 4165.35,2866.93 4165.35,2894.49 4120.35,2889.01 4120.35,2859.01
  region net VCC: 4316.53,3023.45 4265.35,3023.77 4275.66,2978.7 4305.66,2978.52
  region net VCC: 4515.94,3018.17 4465.94,3018.13 4480.97,2988.14 4500.97,2988.15
  region net VCC: 4516.53,3023.63 4465.35,3023.59 4475.97,2978.6 4505.97,2978.62
  region net VCC: 4165.35,3323.61 4165.35,3351.17 4135.35,3348.61 4135.35,3328.61
  region net VCC: 2618.91,4219.67 2633.9,4267.37 2589.89,4299.04 2589.54,4271.1
  region net VCC: 2733.9,4493.23 2718.91,4540.93 2689.59,4489.5 2689.95,4461.56
  region net RST: 2456.98,4494.18 2431.98,4494.2 2439.47,4479.92 2449.47,4479.91
  region net IC19_2: 5288.97,2590.55 5288.97,2562.99 5318.5,2566.97 5318.5,2586.65
  region net IC19_2: 5337.79,2562.99 5337.79,2590.55 5308.26,2586.65 5308.26,2566.97
  region net RST: 5475.88,2612.88 5450.88,2612.88 5458.37,2625.21 5468.37,2625.21
  region net R5_2: 5588.27,2557.04 5539.1,2554.9 5555.13,2526.04 5574.81,2526.9
  region net IC19_9: 5649.37,2841.58 5637.79,2863.73 5622.79,2843.3 5622.79,2829.16
  region net VCC: 5188.65,2894.61 5138.73,2897.41 5155.37,2926.52 5175.37,2925.4
  region net VCC: 5137.79,2862.99 5137.79,2890.55 5107.79,2886.81 5107.79,2866.81
  region net CMD3: 3438.93,2505.88 3419.64,2489.97 3434.95,2483.16 3442.71,2489.55
  region net KEYS1_8: 4467.46,5917.71 4467.46,5929.52 4437.93,5933.45 4437.93,5913.77
  region net KEYS1_8: 4514.7,5929.52 4514.7,5917.71 4535.79,5916.58 4535.79,5930.64
  region net KEYS1_8: 4367.46,5917.71 4367.46,5929.52 4337.93,5933.45 4337.93,5913.77
  region net KEYS1_8: 4414.7,5929.52 4414.7,5917.71 4444.23,5913.77 4444.23,5933.45
  region net KEYS1_8: 4267.46,5917.71 4267.46,5929.52 4237.93,5933.45 4237.93,5913.77
  region net KEYS1_8: 4314.7,5929.52 4314.7,5917.71 4344.23,5913.77 4344.23,5933.45
  region net KEYS1_8: 4214.7,5929.52 4214.7,5917.71 4244.23,5913.77 4244.23,5933.45
  region net KEYS2_8: 4943.3,5917.71 4943.3,5929.52 4913.77,5933.45 4913.77,5913.77
  region net KEYS2_8: 4990.54,5929.52 4990.54,5917.71 5008.56,5917.61 5008.56,5929.62
  region net KEYS2_8: 4843.3,5917.71 4843.3,5929.52 4813.77,5933.45 4813.77,5913.77
  region net KEYS2_8: 4890.54,5929.52 4890.54,5917.71 4920.07,5913.77 4920.07,5933.45
  region net KEYS2_8: 4743.3,5917.71 4743.3,5929.52 4713.77,5933.45 4713.77,5913.77
  region net KEYS2_8: 4790.54,5929.52 4790.54,5917.71 4820.07,5913.77 4820.07,5933.45
  region net KEYS2_8: 4690.54,5929.52 4690.54,5917.71 4720.07,5913.77 4720.07,5933.45
  region net KEYS3_8: 5419.68,5917.71 5419.68,5929.52 5390.15,5933.45 5390.15,5913.77
  region net KEYS3_8: 5319.68,5917.71 5319.68,5929.52 5290.15,5933.45 5290.15,5913.77
  region net KEYS3_8: 5366.92,5929.52 5366.92,5917.71 5396.45,5913.77 5396.45,5933.45
  region net KEYS3_8: 5219.68,5917.71 5219.68,5929.52 5190.15,5933.45 5190.15,5913.77
  region net KEYS3_8: 5266.92,5929.52 5266.92,5917.71 5296.45,5913.77 5296.45,5933.45
  region net KEYS3_8: 5166.92,5929.52 5166.92,5917.71 5196.45,5913.77 5196.45,5933.45
  region net KEYS4_8: 5896.05,5917.71 5896.05,5929.52 5866.52,5933.45 5866.52,5913.77
  region net KEYS4_8: 5796.05,5917.71 5796.05,5929.52 5766.52,5933.45 5766.52,5913.77
  region net KEYS4_8: 5843.29,5929.52 5843.29,5917.71 5872.82,5913.77 5872.82,5933.45
  region net KEYS4_8: 5696.05,5917.71 5696.05,5929.52 5666.52,5933.45 5666.52,5913.77
  region net KEYS4_8: 5743.29,5929.52 5743.29,5917.71 5772.82,5913.77 5772.82,5933.45
  region net KEYS4_8: 5643.29,5929.52 5643.29,5917.71 5672.82,5913.77 5672.82,5933.45
  region net KEYS5_8: 5896.05,5498.82 5896.05,5510.63 5866.52,5514.56 5866.52,5494.87
  region net KEYS5_8: 5796.05,5498.82 5796.05,5510.63 5766.52,5514.56 5766.52,5494.87
  region net KEYS5_8: 5843.29,5510.63 5843.29,5498.82 5872.82,5494.87 5872.82,5514.56
  region net KEYS5_8: 5696.05,5498.82 5696.05,5510.63 5666.52,5514.56 5666.52,5494.87
  region net KEYS5_8: 5743.29,5510.63 5743.29,5498.82 5772.82,5494.87 5772.82,5514.56
  region net KEYS5_8: 5643.29,5510.63 5643.29,5498.82 5672.82,5494.87 5672.82,5514.56
  region net KEYS6_8: 5419.68,5498.82 5419.68,5510.63 5390.15,5514.56 5390.15,5494.87
  region net KEYS6_8: 5453.88,5531.75 5466.92,5504.71 5480.09,5533.04 5477.49,5547.42
  region net KEYS6_8: 5319.68,5498.82 5319.68,5510.63 5290.15,5514.56 5290.15,5494.87
  region net KEYS6_8: 5366.92,5510.63 5366.92,5498.82 5396.45,5494.87 5396.45,5514.56
  region net KEYS6_8: 5219.68,5498.82 5219.68,5510.63 5190.15,5514.56 5190.15,5494.87
  region net KEYS6_8: 5266.92,5510.63 5266.92,5498.82 5296.45,5494.87 5296.45,5514.56
  region net KEYS6_8: 5166.92,5510.63 5166.92,5498.82 5196.45,5494.87 5196.45,5514.56
  region net KEYS7_8: 4943.3,5498.82 4943.3,5510.63 4913.77,5514.56 4913.77,5494.87
  region net KEYS7_8: 4990.54,5510.63 4990.54,5498.82 5008.56,5498.71 5008.56,5510.72
  region net KEYS7_8: 4843.3,5498.82 4843.3,5510.63 4813.77,5514.56 4813.77,5494.87
  region net KEYS7_8: 4890.54,5510.63 4890.54,5498.82 4920.07,5494.87 4920.07,5514.56
  region net KEYS7_8: 4743.3,5498.82 4743.3,5510.63 4713.77,5514.56 4713.77,5494.87
  region net KEYS7_8: 4790.54,5510.63 4790.54,5498.82 4820.07,5494.87 4820.07,5514.56
  region net KEYS7_8: 4690.54,5510.63 4690.54,5498.82 4720.07,5494.87 4720.07,5514.56
  region net KEYS8_8: 4467.46,5498.82 4467.46,5510.63 4437.93,5514.56 4437.93,5494.87
  region net KEYS8_8: 4514.7,5510.63 4514.7,5498.82 4532.72,5498.71 4532.72,5510.72
  region net KEYS8_8: 4367.46,5498.82 4367.46,5510.63 4337.93,5514.56 4337.93,5494.87
  region net KEYS8_8: 4414.7,5510.63 4414.7,5498.82 4444.23,5494.87 4444.23,5514.56
  region net KEYS8_8: 4267.46,5498.82 4267.46,5510.63 4237.93,5514.56 4237.93,5494.87
  region net KEYS8_8: 4314.7,5510.63 4314.7,5498.82 4344.23,5494.87 4344.23,5514.56
  region net KEYS8_8: 4214.7,5510.63 4214.7,5498.82 4244.23,5494.87 4244.23,5514.56
  region net KEYS9_8: 5896.05,5078.97 5896.05,5090.78 5866.52,5094.76 5866.52,5075.07
  region net KEYS9_8: 5943.29,5080.24 5931.21,5058.36 5954.98,5042.48 5956.14,5055.47
  region net KEYS9_8: 5843.29,5090.78 5843.29,5078.97 5872.82,5075.07 5872.82,5094.76
  region net KEYS9_8: 5796.05,5078.97 5796.05,5090.78 5766.52,5094.76 5766.52,5075.07
  region net KEYS9_8: 5743.29,5090.78 5743.29,5078.97 5772.82,5075.07 5772.82,5094.76
  region net KEYS9_8: 5696.05,5078.97 5696.05,5090.78 5666.52,5094.76 5666.52,5075.07
  region net KEYS9_8: 5643.29,5090.78 5643.29,5078.97 5672.82,5075.07 5672.82,5094.76
  region net KEYS10_8: 5419.68,5078.97 5419.68,5090.78 5397.67,5094.76 5397.67,5075.07
  region net KEYS10_8: 5366.92,5090.78 5366.92,5078.97 5396.45,5075.07 5396.45,5094.76
  region net KEYS10_8: 5319.68,5078.97 5319.68,5090.78 5290.15,5094.76 5290.15,5075.07
  region net KEYS10_8: 5266.92,5090.78 5266.92,5078.97 5296.45,5075.07 5296.45,5094.76
  region net KEYS10_8: 5219.68,5078.97 5219.68,5090.78 5190.15,5094.76 5190.15,5075.07
  region net KEYS10_8: 5166.92,5090.78 5166.92,5078.97 5196.45,5075.07 5196.45,5094.76
  region net KEYS11_8: 4943.3,5078.97 4943.3,5090.78 4913.77,5094.76 4913.77,5075.07
  region net KEYS11_8: 4890.54,5090.78 4890.54,5078.97 4920.07,5075.07 4920.07,5094.76
  region net KEYS11_8: 4843.3,5078.97 4843.3,5090.78 4813.77,5094.76 4813.77,5075.07
  region net KEYS11_8: 4790.54,5090.78 4790.54,5078.97 4820.07,5075.07 4820.07,5094.76
  region net KEYS11_8: 4743.3,5078.97 4743.3,5090.78 4713.77,5094.76 4713.77,5075.07
  region net KEYS11_8: 4690.54,5090.78 4690.54,5078.97 4720.07,5075.07 4720.07,5094.76
  region net KEYS12_8: 4467.46,5078.97 4467.46,5090.78 4437.93,5094.76 4437.93,5075.07
  region net KEYS12_8: 4414.7,5090.78 4414.7,5078.97 4444.23,5075.07 4444.23,5094.76
  region net KEYS12_8: 4367.46,5078.97 4367.46,5090.78 4337.93,5094.76 4337.93,5075.07
  region net KEYS12_8: 4314.7,5090.78 4314.7,5078.97 4344.23,5075.07 4344.23,5094.76
  region net KEYS12_8: 4267.46,5078.97 4267.46,5090.78 4237.93,5094.76 4237.93,5075.07
  region net KEYS12_8: 4214.7,5090.78 4214.7,5078.97 4244.23,5075.07 4244.23,5094.76
  region net KEYS13_8: 5897.51,4657.84 5897.51,4669.65 5867.98,4673.55 5867.98,4653.87
  region net KEYS13_8: 5944.75,4659.11 5932.67,4637.23 5956.45,4621.36 5957.61,4634.35
  region net KEYS13_8: 5797.51,4657.84 5797.51,4669.65 5767.98,4673.55 5767.98,4653.87
  region net KEYS13_8: 5844.75,4669.65 5844.75,4657.84 5874.28,4653.87 5874.28,4673.55
  region net KEYS13_8: 5697.51,4657.84 5697.51,4669.65 5667.98,4673.55 5667.98,4653.87
  region net KEYS13_8: 5744.75,4669.65 5744.75,4657.84 5774.28,4653.87 5774.28,4673.55
  region net KEYS13_8: 5644.75,4669.65 5644.75,4657.84 5674.28,4653.87 5674.28,4673.55
  region net KEYS14_8: 5421.13,4657.84 5421.13,4669.65 5391.6,4673.55 5391.6,4653.87
  region net KEYS14_8: 5321.13,4657.84 5321.13,4669.65 5291.6,4673.55 5291.6,4653.87
  region net KEYS14_8: 5368.37,4669.65 5368.37,4657.84 5397.9,4653.87 5397.9,4673.55
  region net KEYS14_8: 5221.13,4657.84 5221.13,4669.65 5191.6,4673.55 5191.6,4653.87
  region net KEYS14_8: 5268.37,4669.65 5268.37,4657.84 5297.9,4653.87 5297.9,4673.55
  region net KEYS14_8: 5168.37,4669.65 5168.37,4657.84 5197.9,4653.87 5197.9,4673.55
  region net KEYS15_8: 4944.75,4657.84 4944.75,4669.65 4915.22,4673.55 4915.22,4653.87
  region net KEYS15_8: 4844.75,4657.84 4844.75,4669.65 4815.22,4673.55 4815.22,4653.87
  region net KEYS15_8: 4891.99,4669.65 4891.99,4657.84 4921.52,4653.87 4921.52,4673.55
  region net KEYS15_8: 4744.75,4657.84 4744.75,4669.65 4715.22,4673.55 4715.22,4653.87
  region net KEYS15_8: 4791.99,4669.65 4791.99,4657.84 4821.52,4653.87 4821.52,4673.55
  region net KEYS15_8: 4691.99,4669.65 4691.99,4657.84 4721.52,4653.87 4721.52,4673.55
  region net KEYS16_8: 4468.91,4657.84 4468.91,4669.65 4439.38,4673.55 4439.38,4653.87
  region net KEYS16_8: 4368.91,4657.84 4368.91,4669.65 4339.38,4673.55 4339.38,4653.87
  region net KEYS16_8: 4416.15,4669.65 4416.15,4657.84 4445.68,4653.87 4445.68,4673.55
  region net KEYS16_8: 4268.91,4657.84 4268.91,4669.65 4239.38,4673.55 4239.38,4653.87
  region net KEYS16_8: 4316.15,4669.65 4316.15,4657.84 4345.68,4653.87 4345.68,4673.55
  region net KEYS16_8: 4216.15,4669.65 4216.15,4657.84 4245.68,4653.87 4245.68,4673.55
Bottom Layer:
  drawing of 658 lines, arcs and shapes, not listed

## Silkscreen, mask and mechanical layers (free items; w line width, h text height)
Top Overlay:
  lines w19.68: 2683.07,2372.05 2683.07,2446.85
  text "CD4543" at 2452.75,5583.1 h70
  text "CA" at 3336.61,5352.79 h70
  text "7486" at 3391.73,4778.97 h70
  text "74283" at 2431.1,4774.05 h70
  text "74161" at 3427.16,4305.54 h70
  text "7474" at 2521.65,4301.61 h70
  text "74161" at 4415.35,4010.27 h70
  text "74238" at 5348.42,4006.33 h70
  text "74153" at 2435.04,3829.17 h70
  text "74153" at 3431.1,3821.29 h70
  text "74157" at 4387.79,3565.39 h70
  text "74238" at 5348.42,3565.39 h70
  text "74219" at 2423.23,3356.73 h70
  text "74161" at 3427.16,3356.73 h70
  text "7474" at 4372.04,3120.51 h70
  text "74161" at 5293.3,3108.7 h70
  text "7400" at 4348.42,2655.94 h70
  text "7414" at 5344.48,2648.07 h70
  text "ATF16V8" at 3226.37,2600.82 h70
  text "ON" at 2639.76,2462.72 h47.01
  text "KEY" at 5411.4,2364.17 h39.37 r90
  text "OFF" at 2627.95,2261.93 h47.01
  text "AUTO" at 5411.4,2131.89 h39.37 r90
  text "5V 0.7A IN" at 2159.45,2078.34 h59.84
Bottom Overlay:
  lines w5.98: 2250,2194.88 2326.77,2194.88 ; 2263.78,2181.1 2311.02,2181.1 ; 2275.59,2167.32 2301.18,2167.32 ; 2287.4,2194.88 2287.4,2307.09
  lines w7.87: 2112.2,2414.64 2316.93,2414.64 ; 2246.06,2537.4 2316.93,2537.4 2316.93,2285.43 2112.2,2285.43 2112.2,2537.69 2249.36,2537.69
  text "JLCJLCJLCJLC" at 2881.89,5858.25 h59.05
  text "+" at 2229.19,2422.1 h70 r315
  text "GND" at 2253.94,2301.18 h47.24
Top Solder:
  lines w39.37: 2096.47,4088.61 2112.77,4104.91 2124.77,4116.91 2135.87,4127.91 2135.82,4147.63 2135.82,4592.51 2135.87,4612.61 2135.87,4616.11 2096.47,4655.51 ; 5994.08,2513.78 5954.72,2553.15 5954.72,2580.71 5954.72,3332.67 5954.72,3356.3 5994.09,3395.67
Bottom Solder:
  circle w59.05: c2750,2460.63 r29.53
  lines w39.37: 2135.82,4145.66 2135.82,4590.55 ; 5954.72,2580.71 5954.72,3332.68